# Altium PCB PCB1.PcbDoc
Units mm, origin at the board's own origin, x right, y up, seen from the top; angles counter-clockwise.
Board outline 63.63 x 57.78 mm, 2 copper layers (Top Layer, Bottom Layer); 26 components, 18 nets, 70 pads, 2 vias.
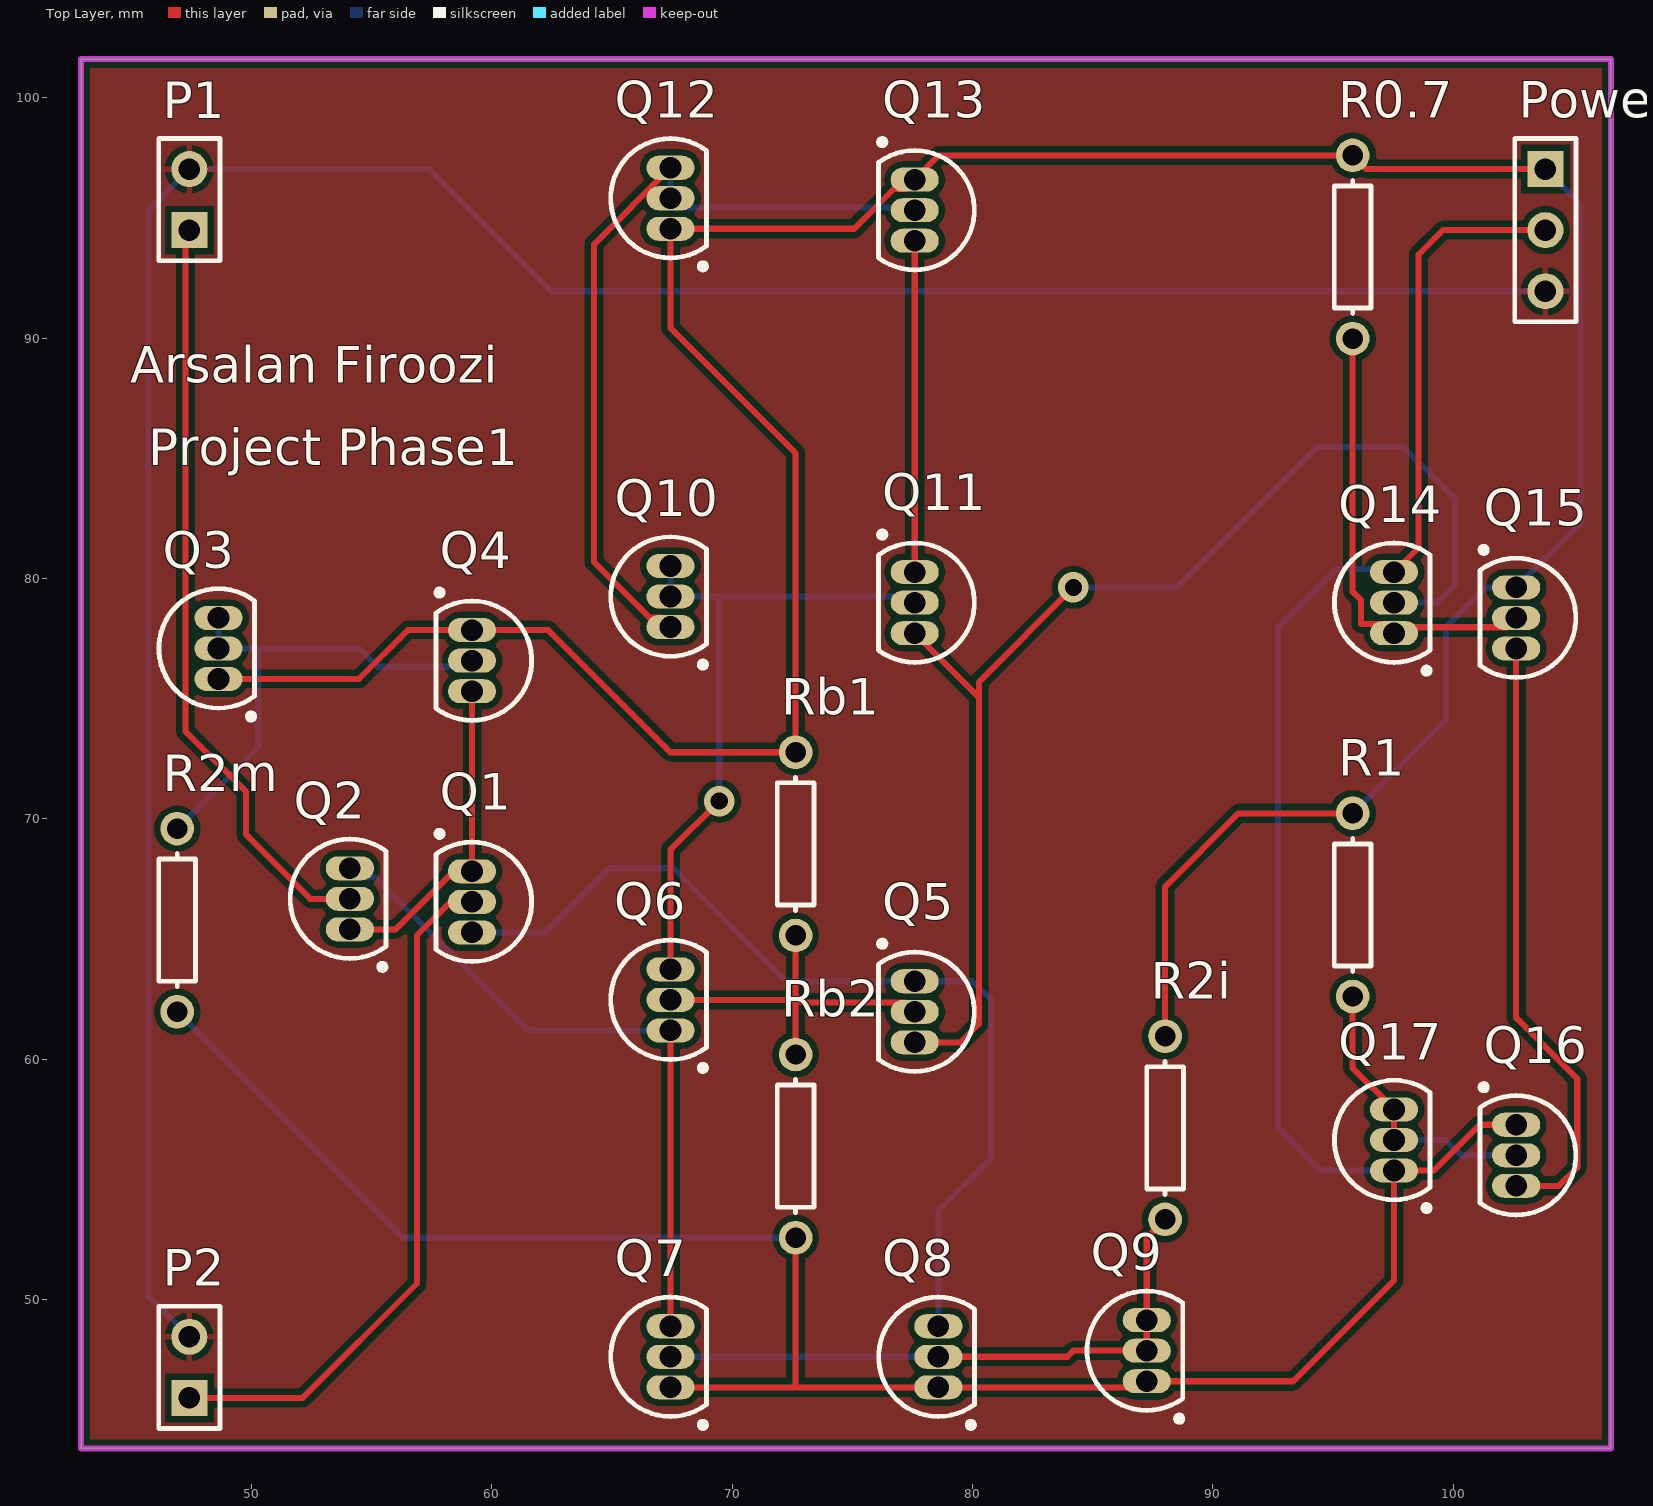
[diagram p0: Top Layer view]
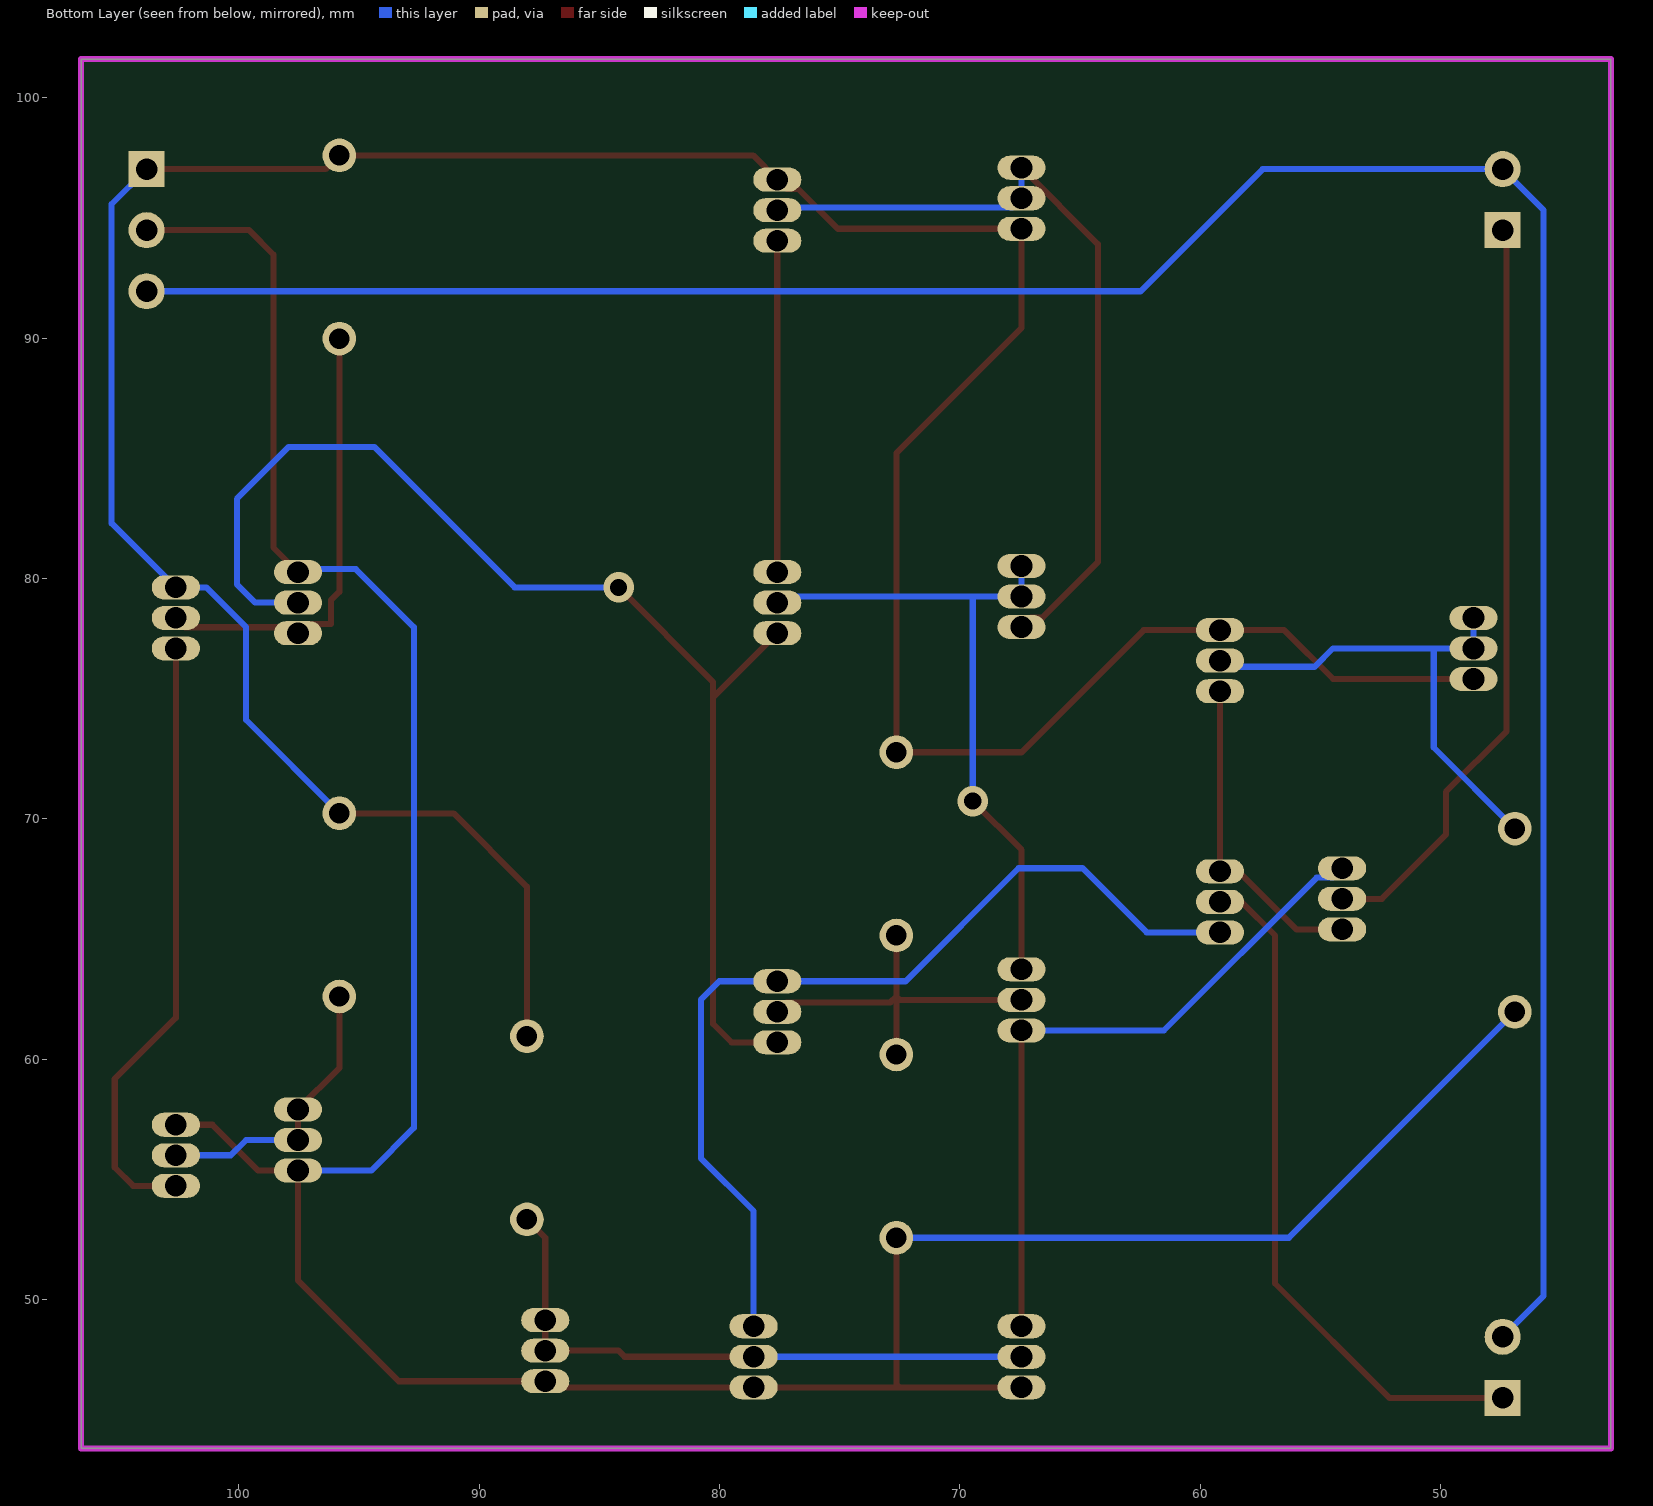
[diagram p1: Bottom Layer view, seen from below]

## Layer stack, top to bottom
Top Solder: solder mask 0.0102, Solder Resist, Dk 3.5
Top Layer: signal copper 0.0356
Dielectric 1: dielectric 0.32, FR-4, Dk 4.8
Bottom Layer: signal copper 0.0356
Bottom Solder: solder mask 0.0102, Solder Resist, Dk 3.5

## Board outline
42.926,43.815 106.553,43.815 106.553,101.6 42.926,101.6

## Design rules (kind name [scope] priority, off if disabled: settings)
Clearance [All] p1: gap=0.254 ignorepadtopadclearanceinfootprint=FALSE except(0: Arc-Hole Track-Hole SMDPad-Hole THPad-Hole Via-Hole Fill-Hole Poly-Hole Region-Hole Text-Hole)
PolygonConnect [All] p1: connectstyle=Relief reliefconductorwidth=0.254 reliefentries=4 polygonreliefangle="90 Angle" airgapwidth=0.254
RoutingVias [All] p1: holewidth=0.711 width=1.27 viastyle="Through Hole" minholewidth=0.711 minwidth=1.27 maxholewidth=0.711 maxwidth=1.27
SolderMaskExpansion [All] p1: expansion=0.102
Width [All] p1: maxlimit=0.254 minlimit=0.254 preferedwidth=0.254
30 further rules are at their usual default settings.

## Components (designator, comment, footprint, x,y, rotation, side; value= is the part's Value field where it differs from the comment)
P1 "Header 2" HDR1X2 47.427,94.488 r90 top
P2 "Header 2" HDR1X2 47.427,45.915 r90 top
Power "Header 3" HDR1X3 103.83,97.028 r270 top
Q1 "2N3906" TO-92A 59.182,66.548 r180 top
Q2 "2N3906" TO-92A 54.102,66.675 r0 top
Q3 "2N3906" TO-92A 48.641,77.089 r0 top
Q4 "2N3906" TO-92A 59.182,76.581 r180 top
Q5 "2N3904" TO-92A 77.597,61.976 r180 top
Q6 "2N3904" TO-92A 67.437,62.472 r0 top
Q7 "2N3904" TO-92A 67.437,47.625 r0 top
Q8 "2N3904" TO-92A 78.581,47.625 r0 top
Q9 "2N3904" TO-92A 87.249,47.879 r0 top
Q10 "2N3906" TO-92A 67.437,79.248 r0 top
Q11 "2N3906" TO-92A 77.597,78.994 r180 top
Q12 "2N3906" TO-92A 67.437,95.814 r0 top
Q13 "2N3906" TO-92A 77.597,95.318 r180 top
Q14 "2N3906" TO-92A 97.536,78.994 r0 top
Q15 "2N3906" TO-92A 102.616,78.359 r180 top
Q16 "2N3904" TO-92A 102.616,56.007 r180 top
Q17 "2N3904" TO-92A 97.536,56.642 r0 top
R0.7 "Res1" AXIAL-0.3 95.814,93.786 r90 top value=0.7k
R1 "Res1" AXIAL-0.3 95.814,66.421 r90 top value=1K
R2i "Res1" AXIAL-0.3 88.011,57.15 r90 top value=1K
R2m "Res1" AXIAL-0.3 46.919,65.786 r90 top value=1K
Rb1 "Res1" AXIAL-0.3 72.644,68.961 r90 top value=1K
Rb2 "Res1" AXIAL-0.3 72.644,56.388 r90 top value=1K

## Footprints (in the part's own frame and the unit in brackets; to place one, negate y for a bottom-side part, rotate by r counter-clockwise, add the part's x,y. Pads: shape width x height; smd on the part's side, far side on the other; paste and mask are expansions set on the pad)
AXIAL-0.3 [mm] "Axial Device, Thru-Hole; 2 Leads; 0.3 in Pin Spacing"
  round 1.4 hole 0.85: 1(-3.81,0) 2(3.81,0)
  silkscreen extent -2.77,-0.76 2.77,0.76
HDR1X2 [mm] "Connector; Header; 2 Position"
  rect 1.5x1.5 hole 0.9: 1(0,0)
  round 1.5 hole 0.9: 2(2.54,0)
  silkscreen extent -1.27,-1.27 3.81,1.27
HDR1X3 [mm] "Connector; Header; 3 Position"
  rect 1.5x1.5 hole 0.9: 1(0,0)
  round 1.5 hole 0.9: 2(2.54,0) 3(5.08,0)
  silkscreen extent -1.27,-1.27 6.35,1.27
TO-92A [mm] "TO, Flat Index; 3 In-Line, Axial Leads; Body Dia. 4.5mm; Leads 0.51 x 0.48 mm (max)"
  oval 2x1 hole 0.9: 1(0,-1.27) 2(0,0) 3(0,1.27)
  silkscreen extent -2.48,-2.95 1.5,2.48, body extent -2.48,-2.5 1.5,2.5, height 6.86

## Part data
P1 P2: "Header, 2-Pin", LatestRevisionDate=17-Jul-2002, LatestRevisionNote="Re-released for DXP Platform.", Publisher="Altium Limited"
Power: "Header, 3-Pin", LatestRevisionDate=17-Jul-2002, LatestRevisionNote="Re-released for DXP Platform.", Publisher="Altium Limited"
Q1 Q2 Q3 Q4 Q10 Q11 Q12 Q13 Q14 Q15: "PNP General Purpose Amplifier", ComponentLink1Description="Manufacturer Link", ComponentLink1URL=http://www.fairchildsemi.com/, ComponentLink2Description=Datasheet, ComponentLink2URL=http://www.fairchildsemi.com/ds/2N%2F2N3906.pdf, DatasheetVersion=1997, LatestRevisionDate=15-Jan-2003, LatestRevisionNote="PCB Footprint 'BCY-W3/D4.7' replaced", PackageDescription="TO, Flat Index; 3 In-Line, Axial Leads; Body Dia. 4.5mm; Leads 0.51 x 0.48 mm (max)", PackageReference=TO-92A, PackageVersion=Sep-1998, Published=8-Jun-2000, Publisher="Altium Limited"
Q5 Q6 Q7 Q8 Q9 Q16 Q17: "NPN General Purpose Amplifier", ComponentLink1Description="Manufacturer Link", ComponentLink1URL=http://www.fairchildsemi.com/, ComponentLink2Description=Datasheet, ComponentLink2URL=http://www.fairchildsemi.com/ds/2N%2F2N3904.pdf, DatasheetVersion=1997, LatestRevisionDate=15-Jan-2003, LatestRevisionNote="PCB Footprint 'BCY-W3/D4.7' replaced", PackageDescription="TO, Flat Index; 3 In-Line, Axial Leads; Body Dia. 4.5mm; Leads 0.51 x 0.48 mm (max)", PackageReference=TO-92A, PackageVersion=Sep-1998, Published=8-Jun-2000, Publisher="Altium Limited"
R0.7 R1 R2i R2m Rb1 Rb2: "Resistor", LatestRevisionDate=17-Jul-2002, LatestRevisionNote="Re-released for DXP Platform.", PackageDescription="Axial Device, Thru-Hole; 2 Leads; 0.3 in Pin Spacing", PackageReference=AXIAL-0.3, Published=8-Jun-2000, Publisher="Altium Limited"

## Via types
v1: diameter 1.27, hole 0.711, Top Layer to Bottom Layer, 2 vias

## Nets (pads, with @x,y where several pads share a name; then routed paths per layer and width w, separated by ;. In a path a pad name is that pad's centre, name@x,y a point inside that pad or via, vN(x,y) a via of type N, cw(c..) or ccw(c..) an arc to the next point about the centre after c; other vN are vias at no path point)
GND: P1.2 P2.2 Power.3 | length 108.5
  Bottom Layer w0.254: P2.2 45.72,50.162 45.72,95.321 P1.2 57.404,97.028 62.484,91.948 Power.3
NetP1_1: P1.1 Q2.2 | length 31.7
  Top Layer w0.254: P1.1 47.26,94.321 47.26,73.644 49.784,71.12 49.784,69.342 52.451,66.675 Q2.2
NetP2_1: P2.1 Q1.2 | length 28.8
  Top Layer w0.254: P2.1 52.138,45.915 56.896,50.673 56.896,65.151 58.293,66.548 Q1.2
NetQ1_1: Q1.1 Q2.1 Q4.3 | length 13.6
  Top Layer w0.254: Q2.1 56.007,65.405 58.42,67.818 Q1.1 Q4.3
NetQ1_3: Q1.3 Q5.1 Q8.3 | length 39.5
  Bottom Layer w0.254: Q1.3 62.23,65.278 64.897,67.945 67.564,67.945 72.263,63.246 Q5.1 80.01,63.246 80.772,62.484 80.772,55.88 78.581,53.689 Q8.3
NetQ2_3: Q2.3 Q6.1 Q7.3 | length 28.4
  Top Layer w0.254: Q7.3 Q6.1
  Bottom Layer w0.254: Q2.3 54.491,67.556 55.158,67.556 61.512,61.202 Q6.1
NetQ3_2: Q3.2 Q3.3 Q4.2 R2m.2 | length 21.1
  Bottom Layer w0.254: R2m.2 50.292,72.969 50.292,77.089 ; Q3.3 Q3.2 50.292,77.089 ; Q4.2 58.928,76.327 55.245,76.327 54.483,77.089 50.292,77.089
NetQ5_2: Q5.2 Q6.2 Rb1.1 Rb2.2 | length 15.4
  Top Layer w0.254: Q6.2 72.505,62.472 72.644,62.611 ; Rb2.2 72.644,62.611 ; Rb1.1 72.644,62.611 ; Q5.2 77.208,62.365 72.89,62.365 72.644,62.611
NetQ5_3: Q5.3 Q11.3 Q14.2 | length 52.1
  Top Layer w0.254: Q5.3 79.502,60.706 80.264,61.468 80.264,75.057 ; Q11.3 80.264,75.057 ; v1(84.201,79.629) 80.264,75.692 80.264,75.057
  Bottom Layer w0.254: v1(84.201,79.629) 88.519,79.629 94.361,85.471 97.917,85.471 100.076,83.312 100.076,79.756 99.314,78.994 Q14.2
NetQ6_3: Q6.3 Q10.2 Q10.3 Q11.2 | length 27.9
  Top Layer w0.254: Q6.3 67.437,68.707 v1(69.469,70.739)
  Bottom Layer w0.254: Q10.3 Q10.2 69.469,79.248 ; v1(69.469,70.739) 69.469,79.248 ; Q11.2 77.343,79.248 69.469,79.248
NetQ7_2: Q7.2 Q8.2 Q9.2 Q9.3 R2i.1 | length 25.7
  Top Layer w0.254: Q8.2 83.947,47.625 84.201,47.879 Q9.2 Q9.3 87.249,52.578 R2i.1
  Bottom Layer w0.254: Q7.2 Q8.2
NetQ10_1: Q10.1 Q12.2 Q12.3 Q13.2 | length 33.7
  Top Layer w0.254: Q10.1 67.048,78.367 66.572,78.367 64.262,80.677 64.262,93.909 Q12.3
  Bottom Layer w0.254: Q12.3 Q12.2 67.826,95.425 77.597,95.425 Q13.2
NetQ11_1: Q11.1 Q13.3 | length 13.8
  Top Layer w0.254: Q11.1 Q13.3
NetQ14_1: Q14.1 Q15.2 R0.7.1 | length 19
  Top Layer w0.254: R0.7.1 95.814,79.446 96.155,79.105 96.155,78.113 97.147,78.113 Q14.1 97.536,77.97 102.227,77.97 Q15.2
NetQ15_3: Q15.3 Q16.3 | length 25.5
  Top Layer w0.254: Q16.3 104.394,54.737 105.156,55.499 105.156,59.182 102.616,61.722 Q15.3
NetQ16_2: Q16.2 Q17.2 Q17.3 R1.1 | length 12
  Top Layer w0.254: R1.1 95.814,59.634 Q17.3 Q17.2
  Bottom Layer w0.254: Q17.2 99.695,56.642 100.33,56.007 Q16.2
VCC: Power.1 Q3.1 Q4.1 Q12.1 Q13.1 Q15.1 R0.7.2 R1.2 R2i.2 Rb1.2 | length 136.1
  Top Layer w0.254: Q3.1 54.483,75.819 56.515,77.851 Q4.1 62.357,77.851 67.437,72.771 Rb1.2 72.644,85.217 67.437,90.424 Q12.1 75.077,94.544 76.732,96.199 77.208,96.199 Q13.1 78.605,97.596 R0.7.2 96.382,97.028 Power.1 ; R2i.2 88.011,67.183 91.059,70.231 R1.2
  Bottom Layer w0.254: R1.2 99.695,74.112 99.695,77.978 101.346,79.629 Q15.1 105.283,82.296 105.283,95.575 Power.1
VEE: Power.2 Q7.1 Q8.1 Q9.1 Q14.3 Q16.1 Q17.1 R2m.1 Rb2.1 | length 129.9
  Top Layer w0.254: Q7.1 72.517,46.355 ; Rb2.1 72.644,46.482 72.517,46.355 ; Q14.3 98.552,81.28 98.552,93.472 99.568,94.488 Power.2 ; Q16.1 101.092,57.277 99.187,55.372 Q17.1 97.536,50.8 93.345,46.609 Q9.1 86.995,46.355 Q8.1 72.517,46.355
  Bottom Layer w0.254: R2m.1 56.317,52.578 Rb2.1 ; Q17.1 94.488,55.372 92.71,57.15 92.71,77.978 95.123,80.391 97.409,80.391 Q14.3

## Polygon pours and split planes (outlines as drawn)
GND on Top Layer "GND_L01_P000" (solid, pour order 0): 42.926,101.6 106.553,101.6 106.553,43.815 42.926,43.815

## Keep-outs
Keep-Out Layer:
  lines w0.254: 42.926,43.815 42.926,101.6 106.553,101.6 106.553,85.598 106.553,58.928 106.553,43.815 104.648,43.815 42.926,43.815

## Silkscreen, mask and mechanical layers (free items; w line width, h text height)
Top Overlay:
  text "Arsalan Firoozi" at 44.958,88.138 h1.52
  text "Project Phase1" at 45.72,84.709 h1.52